# Altium PCB 4.PcbDoc
Units mil, origin at the board's own origin, x right, y up, seen from the top; angles counter-clockwise.
Board outline 1279.91 x 1283.3 mil, 4 copper layers (Top Layer, GND02, PWR03, Bottom Layer), stack 23.756 mil thick; 31 components, 52 nets, 163 pads, 53 vias.
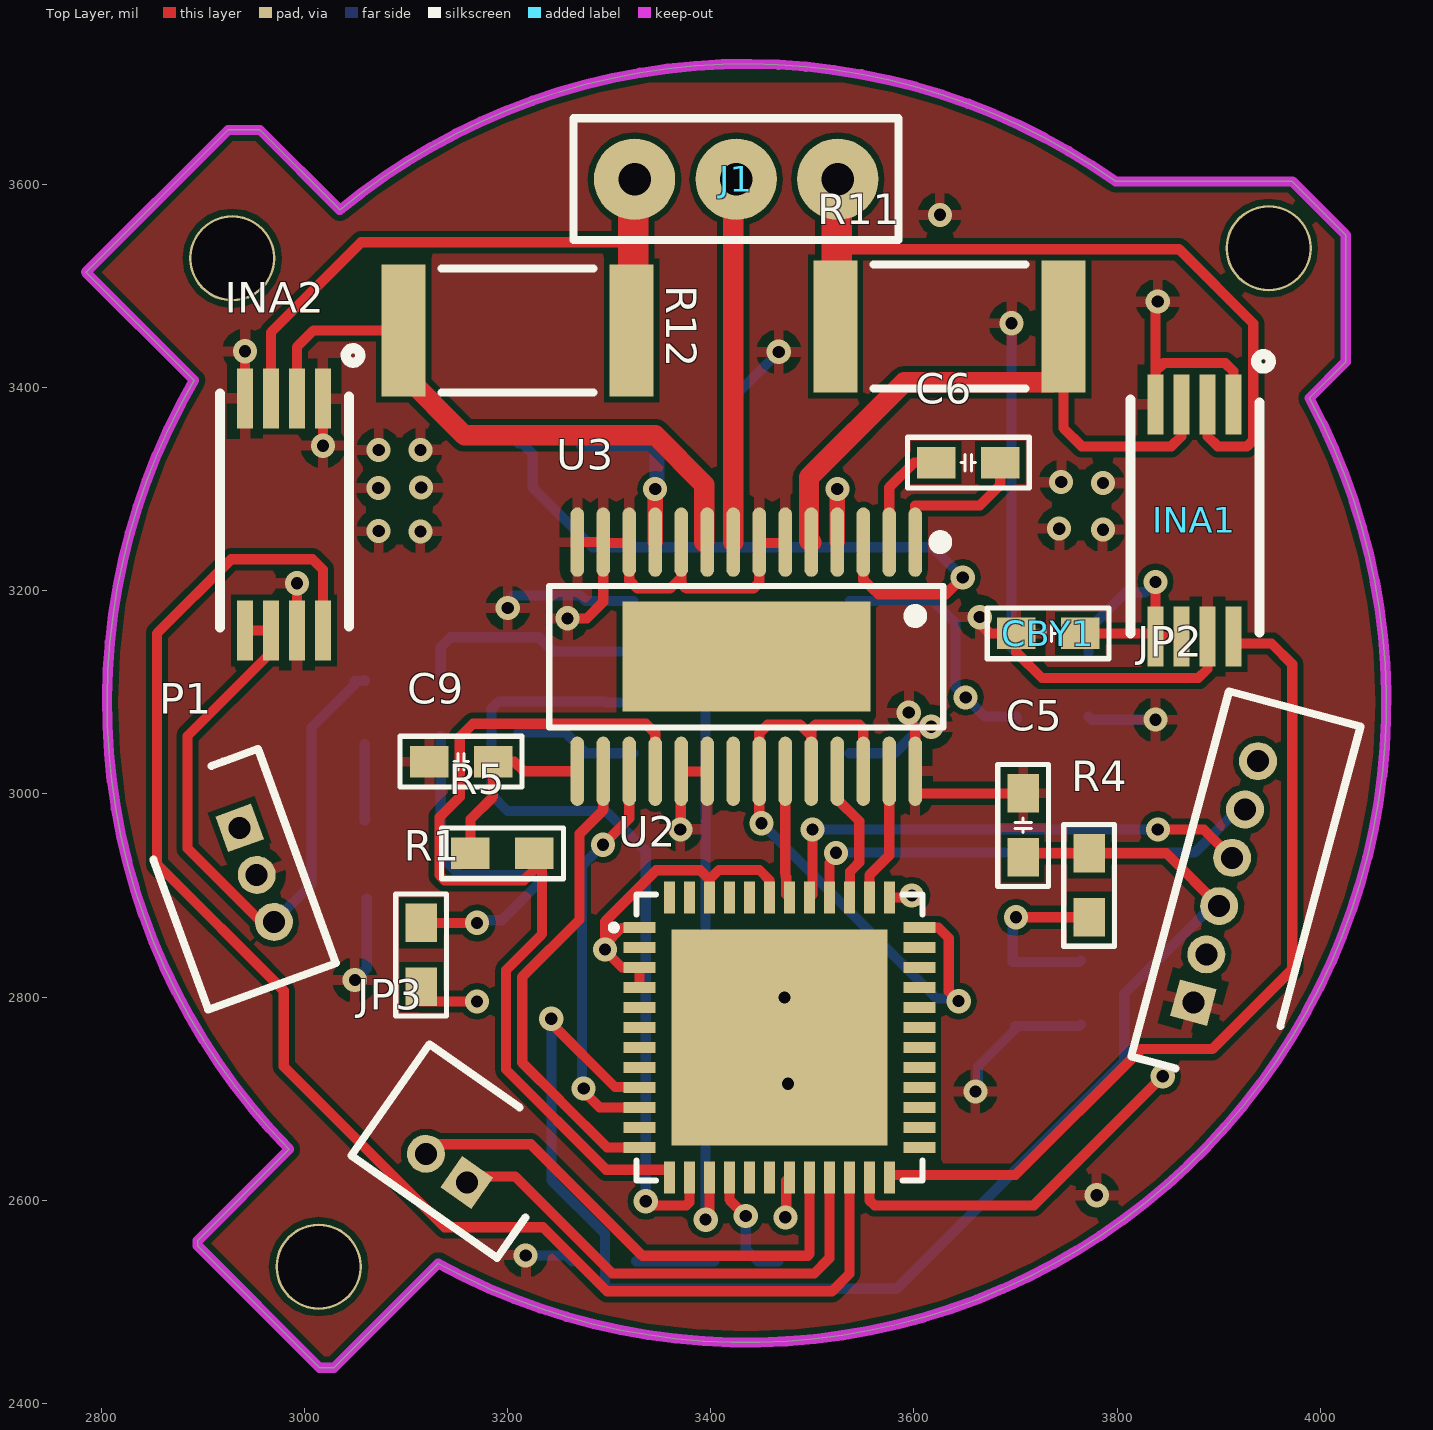
[diagram p0: Top Layer view]
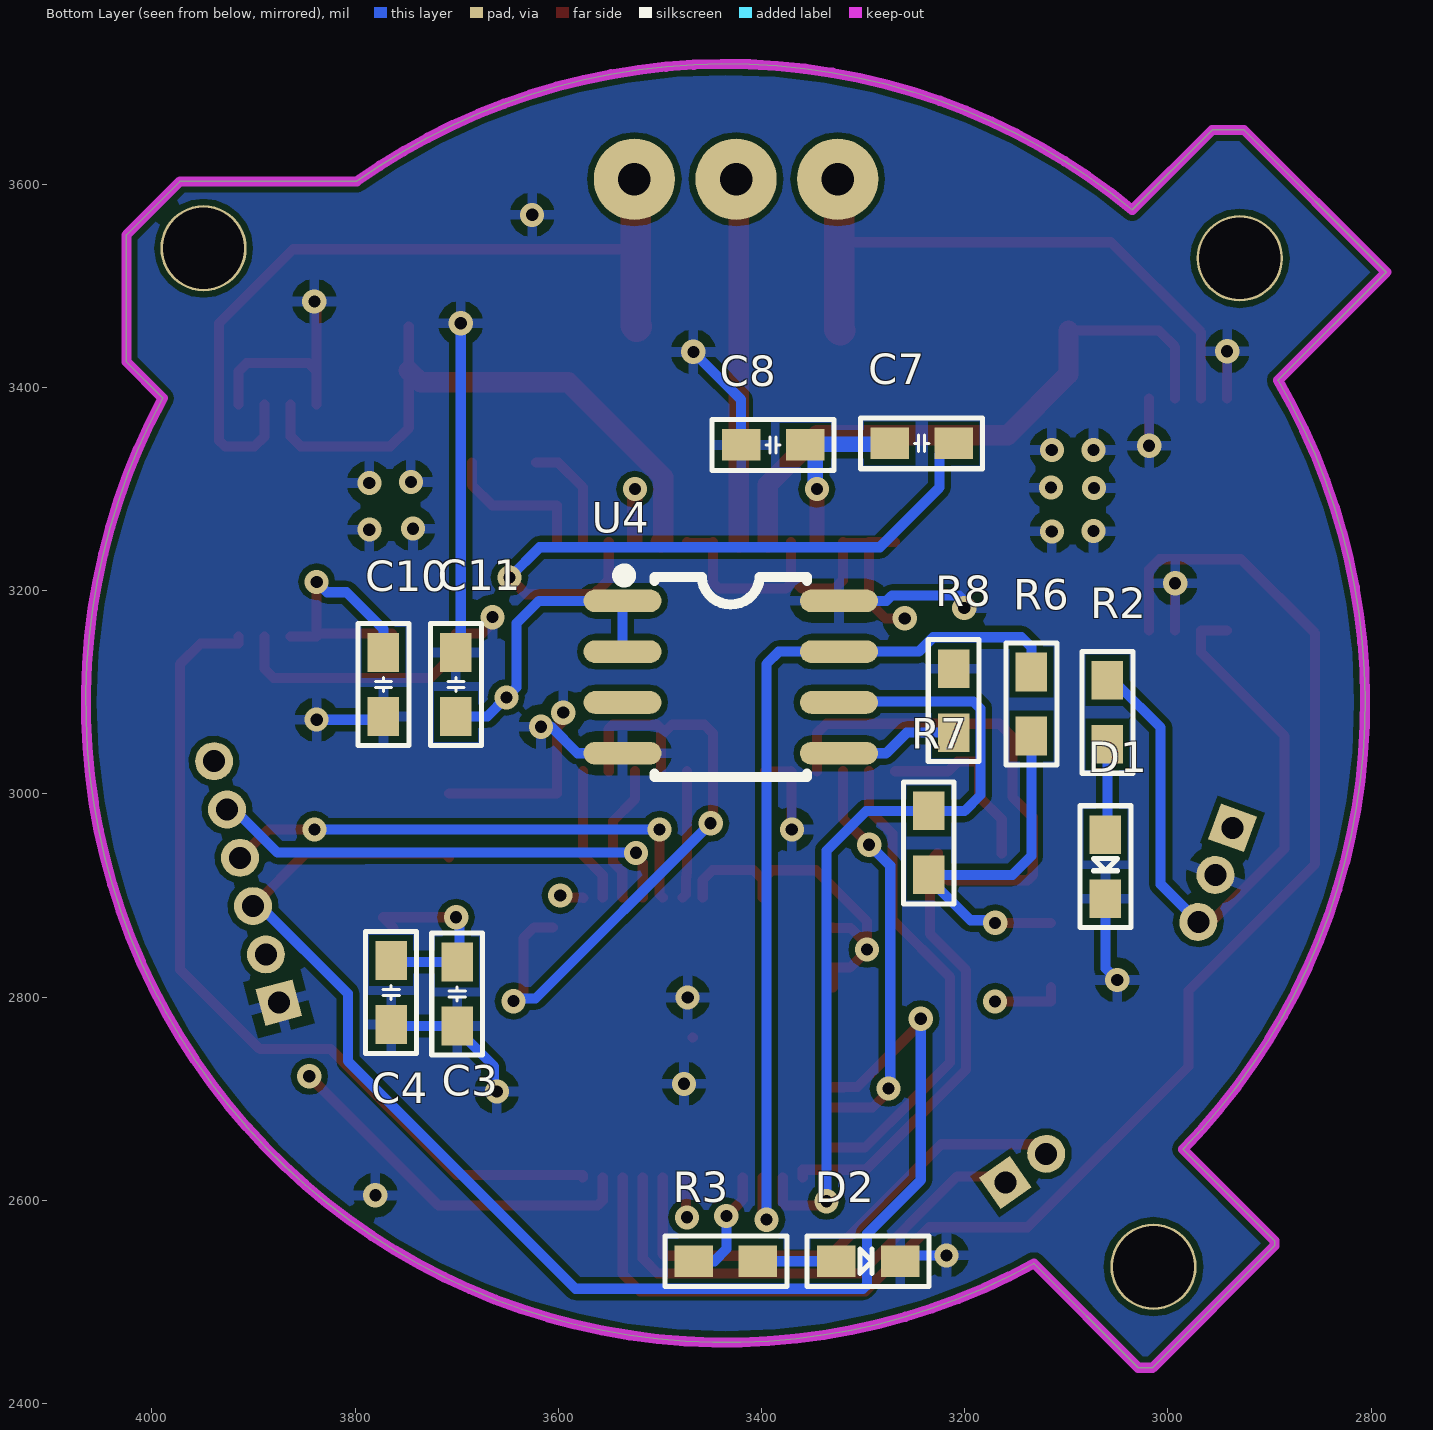
[diagram p1: Bottom Layer view, seen from below]
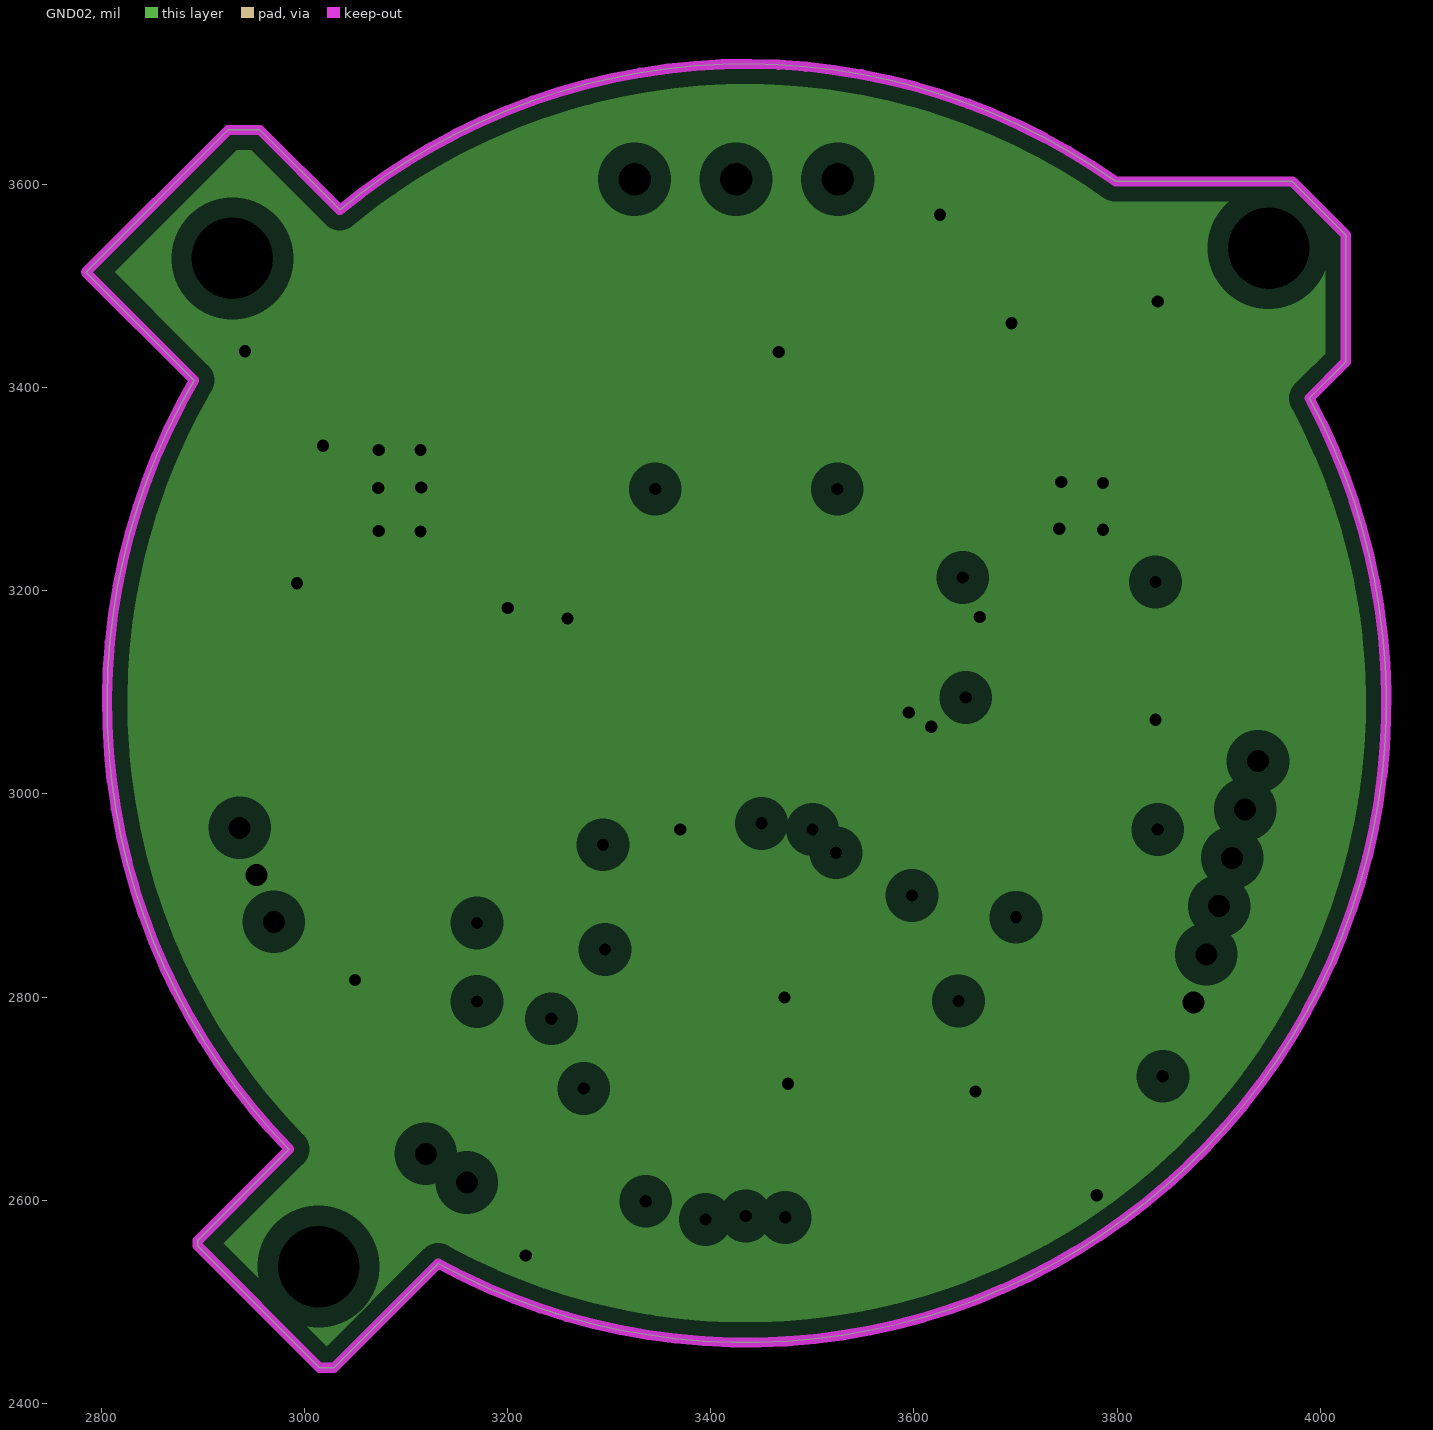
[diagram p2: GND02, clearances drawn from the general rule]
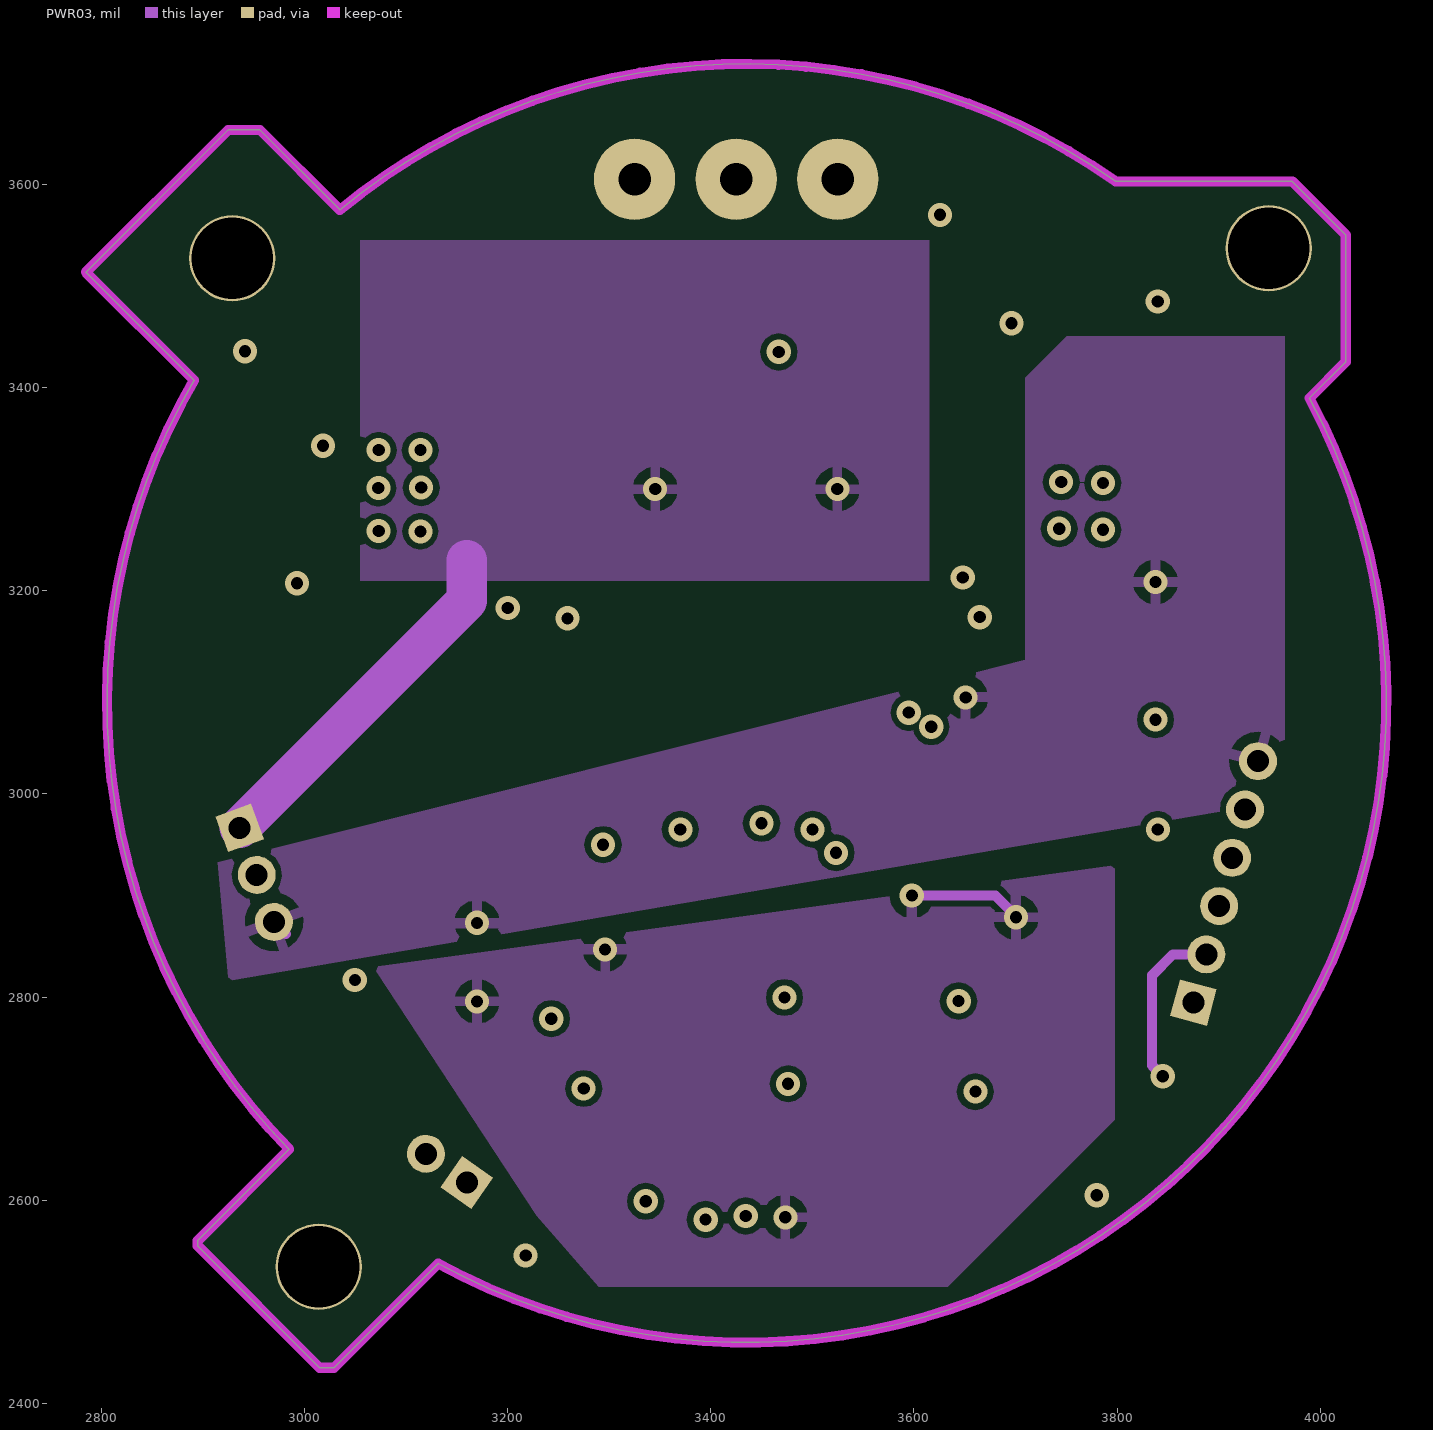
[diagram p3: PWR03]

## Layer stack, top to bottom
Top Solder: solder mask 0.4, Solder Resist, Dk 3.5
Top Layer: signal copper 1.4
Dielectric 3: prepreg 2.8, PP-006, Dk 4.1
GND02: plane copper 1.3778, net GND
Dielectric 2: prepreg 2.8, PP-006, Dk 4.1
PWR03: signal copper 1.3778
Dielectric 1: dielectric 12.6, FR-4, Dk 4.8
Bottom Layer: signal copper 1.4
Bottom Solder: solder mask 0.4, Solder Resist, Dk 3.5

## Board outline
2895,2555.21 2895,2560.21 2985,2650.21 cw(c3435,3090) 2891.58,3407.2 2891.44,3407.06 2785,3513.5 2925,3653.5 2956.36,3653.5 3035.02,3574.84 3034.92,3574.74 cw(c3435,3090) 3798.34,3602.86 3972.35,3602.86 4025,3550.21 4025,3425.21 3989.33,3389.54 3989.26,3389.5 cw(c3435,3090) 3131.76,2537.78 3029.19,2435.21 3015,2435.21

## Design rules (kind name [scope] priority, off if disabled: settings)
Clearance [All] p1: gap=6 ignorepadtopadclearanceinfootprint=FALSE
MinimumSolderMaskSliver [All] p1: minsoldermaskwidth=0
PlaneClearance [All] p1: clearance=20
PlaneConnect [All] p1: planeconnectstyle=Relief reliefexpansion=20 reliefentries=4 reliefconductorwidth=10 reliefairgap=10
PolygonConnect [All] p1: connectstyle=Relief reliefconductorwidth=10 reliefentries=4 polygonreliefangle="90 Angle" airgapwidth=10
RoutingVias [All] p1: holewidth=12 width=24 viastyle="Through Hole" minholewidth=28 minwidth=50 maxholewidth=28 maxwidth=50
SilkToSilkClearance [All] p1: silktosilkclearance=0
SilkToSolderMaskClearance [IsPad] p1: minsilkscreentomaskgap=0 clearancetoexposedcopper=TRUE
SolderMaskExpansion [All] p1: expansion=4
Width [All] p1: maxlimit=50 minlimit=1 preferedwidth=10
25 further rules are at their usual default settings.

## Components (designator, comment, footprint, x,y, rotation, side; value= is the part's Value field where it differs from the comment)
C3 "10uF" 0603C 3699.49,2803.02 r90 bottom
C4 "100nF" 0603C 3764.5,2804.47 r90 bottom
C5 "1uF" 0603C 3707.49,2969 r270 top
C6 "10nF" 0603C 3653.5,3326.01 r0 top
C7 "100nF" 0603C 3242.34,3345 r0 bottom
C8 "10uF" 0603C 3388.5,3343.4 r180 bottom
C9 "1uF" 0603C 3154.33,3031.76 r0 top
C10 "100nF" 0603C 3772,3107.63 r90 bottom
C11 "10uF (106) 10% 10V" 0603C 3700.7,3107.63 r270 bottom
CBY1 "0.1μF" 0603C 3732.2,3158 r180 top
D1 "蓝灯 0603" 0603_diode 3061.38,2928.32 r270 bottom
D2 "蓝灯 0603" 0603_diode 3295,2540 r180 bottom
INA1 "INA240A2" INA240 3876.15,3269.22 r180 top
INA2 "INA240A1" INA240 2980,3275 r180 top
J1 "90120-0763" 10.7MHZ 3525,3605 r180 top
JP2 "SPI1" SHDR6 3875,2794.48 r75 top
JP3 "Header 2" SHDR2 3160,2617.5 r325 top
P1 "TB002-500-03BE" SHDR3 2936.34,2966.49 r110 top
R1 "0Ω (0R0) ±1%" 0603R 3115,2841.49 r90 top
R2 "2KΩ" 0603R 3059.43,3080.27 r90 bottom
R3 "2KΩ" 0603R 3435,2540 r0 bottom
R4 "10K" 0603R 3772.5,2910 r270 top
R5 "10K" 0603R 3195,2941.5 r0 top
R6 "10KΩ" 0603 3134.21,3088.5 r270 bottom
R7 "10K" 0603R 3235.34,2951.73 r270 bottom
R8 "1K" 0603 3210.83,3091.76 r90 bottom
R11 "10mOhm" RESC6332#1 3635,3460 r180 top
R12 "10mOhm" RESC6332#2 3210,3456.12 r0 top value=1K
U2 "ESP32-PICO-D4" pico 3478.53,2760.21 r270 top
U3 "DRV8313PWPR" HTSSOP-28_L9.8-W4.5-P0.65-LS6.6-BL-EP 3435,3135 r180 top
U4 "AS5600-ASOM" SOIC-8_L5.0-W4.0-P1.27-LS6.0-BL 3430.21,3115 r270 bottom

## Footprints (in the part's own frame and the unit in brackets; to place one, negate y for a bottom-side part, rotate by r counter-clockwise, add the part's x,y. Pads: shape width x height; smd on the part's side, far side on the other; paste and mask are expansions set on the pad)
10.7MHZ [mil]
  round 80 hole 32: 1(0,0) 2(200,0) 3(100,0)
  silkscreen extent -60,-60 260,60
0603 [mil]
  rect 38x31 smd: 1(-31.5,0) 2(31.5,0)
  silkscreen extent -60,-25 60,25
0603_diode [mil]
  rect 38x31 smd: 1(-31.5,0) 2(31.5,0)
  silkscreen extent -60,-25 60,25
0603C [mil]
  rect 38x31 smd: 1(-31.5,0) 2(31.5,0)
  silkscreen extent -60,-25 60,25
0603R [mil]
  rect 38x31 smd: 1(-31.5,0) 2(31.5,0)
  silkscreen extent -60,-25 60,25
HTSSOP-28_L9.8-W4.5-P0.65-LS6.6-BL-EP [mil]
  oval 13.5x68.2 smd mask+2: 1(-166.3,-112.8) 2(-140.7,-112.8) 3(-115.2,-112.8) 4(-89.6,-112.8) 5(-64,-112.8) 6(-38.4,-112.8) 7(-12.8,-112.8) 8(12.8,-112.8) 9(38.4,-112.8) 10(64,-112.8) 11(89.6,-112.8) 12(115.2,-112.8) 13(140.8,-112.8) 14(166.3,-112.8) 15(166.3,112.8) 16(140.8,112.8) 17(115.2,112.8) 18(89.6,112.8) 19(64,112.8) 20(38.4,112.8) 21(12.8,112.8) 22(-12.8,112.8) 23(-38.4,112.8) 24(-64,112.8) 25(-89.6,112.8) 26(-115.2,112.8) 27(-140.7,112.8) 28(-166.3,112.8)
  rect 244.1x108.3 smd mask+2: 29(0,0)
  silkscreen extent -197,-119 194,70
INA240 [mm]
  rect 0.4x1.5 smd mask+0.05: 1(-0.975,-2.9) 2(-0.325,-2.9) 3(0.325,-2.9) 4(0.975,-2.9) 5(0.975,2.9) 6(0.325,2.9) 7(-0.325,2.9) 8(-0.975,2.9)
  silkscreen extent -1.91,-4.16 1.6,2.82, body extent -1.5,-3.3 1.5,3.3, height 1.2
pico [mm]
  rect 0.28x0.8 smd: 1(-2.75,-3.778) 2(-2.25,-3.778) 3(-1.75,-3.778) 4(-1.25,-3.778) 5(-0.75,-3.778) 6(-0.25,-3.778) 7(0.25,-3.778) 8(0.75,-3.778) 9(1.25,-3.778) 10(1.75,-3.778) 11(2.25,-3.778) 12(2.75,-3.778) 25(2.75,3.222) 26(2.25,3.222) 27(1.75,3.222) 28(1.25,3.222) 29(0.75,3.222) 30(0.25,3.222) 31(-0.25,3.222) 32(-0.75,3.222) 33(-1.25,3.222) 34(-1.75,3.222) 35(-2.25,3.222) 36(-2.75,3.222)
  rect 0.8x0.28 smd: 13(3.5,-3.027) 14(3.5,-2.527) 15(3.5,-2.027) 16(3.5,-1.527) 17(3.5,-1.027) 18(3.5,-0.527) 19(3.5,-0.027) 20(3.5,0.473) 21(3.5,0.973) 22(3.5,1.473) 23(3.5,1.973) 24(3.5,2.473) 37(-3.5,2.473) 38(-3.5,1.972) 39(-3.5,1.473) 40(-3.5,0.972) 41(-3.5,0.473) 42(-3.5,-0.028) 43(-3.5,-0.527) 44(-3.5,-1.028) 45(-3.5,-1.527) 46(-3.5,-2.028) 47(-3.5,-2.527) 48(-3.5,-3.028)
  rect 5.4x5.4 smd: 49(0,-0.278)
  silkscreen extent -3.58,-4.49 3.58,3.3
RESC6332#1 [mil] "Chip Resistor, Body 6.3x3.2mm, IPC High Density"
  rect 43.3x129.9 smd: 1(-112.2,0)
  rect 43x130 smd: 2(112.2,0)
  silkscreen extent -75,-61 75,61, body extent -127,-66 127,66, height 35
RESC6332#2 [mil] "Chip Resistor, Body 6.3x3.2mm, IPC High Density"
  rect 43.31x129.92 smd: 1(-112.2,0) 2(112.2,0)
  silkscreen extent -75,-61 75,61, body extent -127,-66 127,66, height 35
SHDR2 [mm]
  rect 0.95x0.95 hole 0.55: 1(0,0)
  round 0.95 hole 0.55: 2(-1.25,0)
  silkscreen extent -2.75,-1.11 1.7,2.29
SHDR3 [mm]
  rect 0.95x0.95 hole 0.55: 1(0,0)
  round 0.95 hole 0.55: 2(-1.25,0) 3(-2.5,0)
  silkscreen extent -4,-1.11 1.7,2.29
SHDR6 [mm]
  rect 0.95x0.95 hole 0.55: 1(0,0)
  round 0.95 hole 0.55: 2(1.25,0) 3(2.5,0) 4(3.75,0) 5(5,0) 6(6.25,0)
  silkscreen extent -1.7,-2.25 7.75,1.15
SOIC-8_L5.0-W4.0-P1.27-LS6.0-BL [mil]
  oval 22.38x76.78 smd mask+2: 1(-75,-106.5) 2(-25,-106.5) 3(25,-106.5) 4(75,-106.5) 5(75,106.5) 6(25,106.5) 7(-25,106.5) 8(-75,106.5)
  silkscreen extent -106,-111 98,75

## Part data
C3 C8 C11: SuppliersPartNumber=C19702, ComponentLink1Description=供?, ComponentLink1URL=http://www.szlcsc.com/product/details_20411.html, Supplier=LC
C4 C7 C10: SuppliersPartNumber=C14663, ComponentLink1Description=供?, ComponentLink1URL=http://www.szlcsc.com/product/details_15331.html, Supplier=LC
C5 C9: SuppliersPartNumber=C15849, ComponentLink1Description=供?, ComponentLink1URL=http://www.szlcsc.com/product/details_16531.html, Supplier=LC
C6: SuppliersPartNumber=C57112, ComponentLink1Description=供?, ComponentLink1URL=http://www.szlcsc.com/product/details_58143.html, Supplier=LC
CBY1: library part CAP_1
D1 D2: SuppliersPartNumber=C72041, ComponentLink1Description=供?, ComponentLink1URL=http://www.szlcsc.com/product/details_73150.html, Supplier=LC
INA1 INA2: library part INA240, Supplier Part Number 1=595-INA240A2PWR, Supplier 1=Mouser
J1: Current Rating=3A, Manufacturer=Molex, Temperature="-55°C to +125?", Temperature Range High=+125°C, Temperature Range Low=-55°C, Voltage Rating=350V, Automotive=No, Category=Conn, ComponentLink2Description=Datasheet, ComponentLink2URL=https://www.molex.com/webdocs/datasheets/pdf/en-us/0901200763_PCB_HEADERS.pdf, Conn Gender=Male, Conn Orientation=Vertical, Contact Material=Gold,Nickel, Device Class L1=Connectors, Device Class L2="Headers and Wire Housings", Device Class L3=unset, Digikey Description="CONN HEADER VERT 3POS 2.54MM", Footprint Url=https://www.molex.com/pdm_docs/sd/901200763_sd.pdf, Height=5.8mm, Lead Free=Yes, Manufacturer Part Number=90120-0763, Mouser Description="Board-To-Board Connector, C-Grid III 90120 Series, Through Hole, Header, 3, 2.54 mm", Number Of Contacts=3, Number Of Rows=1, Octopart=https://octopart.com/90120-0763-molex-655433, Pitch=2.54mm, RoHS=TRUE
JP2: library part "HEADER 6"
JP3: "Header, 2-Pin", LatestRevisionDate=17-Jul-2002, LatestRevisionNote="Re-released for DXP Platform.", Publisher="Altium Limited"
P1: Supplier Part Number 1=490-TB002-500-03BE, Supplier 1=Mouser
R1: SuppliersPartNumber=C21189, ComponentLink1Description=供?, ComponentLink1URL=http://www.szlcsc.com/product/details_21903.html, Supplier=LC
R2 R3: SuppliersPartNumber=C22975, ComponentLink1Description=供?, ComponentLink1URL=http://www.szlcsc.com/product/details_23702.html, Supplier=LC
R4 R5 R6 R7: SuppliersPartNumber=C25804, ComponentLink1Description=供?, ComponentLink1URL=http://www.szlcsc.com/product/details_26547.html, Supplier=LC
R8: SuppliersPartNumber=C21190, ComponentLink1Description=供?, ComponentLink1URL=http://www.szlcsc.com/product/details_21904.html, Supplier=LC
R11: library part RES2
R12: library part Res1, "Resistor", Ordered by=Subcon, Published=8-Jun-2000, Publisher="Altium Limited", Revision="July-2002: Re-released for DXP Platform."

## Free pads (board coordinates)
  round 85 hole 80: 8(2929.11,3527.08) 8(3014.11,2534.65) 8(3949.11,3537.08)

## Via types
v1: diameter 23.62/23.62/23.62 (per signal layer), hole 12, Top Layer to Bottom Layer, 27 vias
v2: diameter 24, hole 12, Top Layer to Bottom Layer, 25 vias
v3: diameter 23.62, hole 12, Top Layer to Bottom Layer, 1 vias

## Nets (pads, with @x,y where several pads share a name; then routed paths per layer and width w, separated by ;. In a path a pad name is that pad's centre, name@x,y a point inside that pad or via, vN(x,y) a via of type N, cw(c..) or ccw(c..) an arc to the next point about the centre after c; other vN are vias at no path point)
EN: C5.2 JP2.3 R4.1 U2.9 | length 1429.1
  Top Layer w10: v2(3243.13,2778.74) 3243.13,2774.13 3305.75,2711.51 3329.29,2711.51 U2.9 U2.9@3318.9,2711 ; C5.2 3711.49,2941.5 R4.1 3848.53,2941.5 JP2.3
  Bottom Layer w10: v2(3243.13,2778.74) 3243.13,2619.87 3296,2567 3296,2517 3300,2513 3582.99,2513 3806.95,2736.97 3806.95,2803.24 3893.27,2889.55 JP2.3
ENA: U2.36 U3.22 U3.24 U3.26 | length 652.8
  Top Layer w10: v2(3450,2971) 3447.8,2973.2 U3.22 3447.8,3059.8 3456,3068 3488,3068 3499,3057 ; U3.24 3499,3057 ; U3.26 3550.2,3064 3546.2,3068 3503,3068 3499,3064 3499,3057 ; U2.36 3624,2868.48 3634.34,2858.14 3634.34,2805.66 v2(3644,2796)
  Bottom Layer w10: v2(3450,2971) 3622.32,2798.68 3641.32,2798.68 v2(3644,2796)
FAULT: R5.2 U2.13 U3.18 | length 939.1
  Top Layer w10: U3.18 3345.4,3059.6 3336,3069 3166,3069 3153,3056 3153,2997 3133,2977 3133,2920 3138,2915 3216,2915 3226.5,2925.5 R5.2 3233.98,2934.02 3233.98,2861.97 3198.56,2826.54 3198.56,2728.65 3297.21,2630 3359.34,2630 U2.13
FLASH_CLK: U2.31
FLASH_CS: U2.25
FLASH_SD0: U2.27
FLASH_SD1: U2.33
FLASH_SD2: U2.30
FLASH_SD3: U2.32
GND: C3.1 C4.1 C5.1 C8.1 C9.1 C10.1 C11.1 CBY1.2 D1.2 D2.2 INA1.1 INA1.4 INA1.7 INA2.1 INA2.4 INA2.7 JP2.1 P1.2 R8.2 U2.49 U3.6 U3.7 U3.10 U3.12 U3.13 U3.14 U3.19 U3.20 U3.28 U4.4 U4.8 | length 2378.4
  Top Layer w10: INA2.4 v2(2941.61,3435.7) ; INA2.7 v2(2992.8,3207.35) ; v2(3018.39,3342.65) INA2.1 ; v2(3258.99,3172.69) 3277.94,3172.69 3294.2,3188.95 U3.13@3294.2,3247 ; U3.14 3268.7,3248 3294.2,3248 U3.13 U3.13@3294.2,3247 ; U3.12 U3.12@3319.8,3247 ; v1(3370.07,2965) 3370.53,2965.47 3370.53,3021.73 U3.19 3371,3022 3396.6,3022 U3.20 ; U3.10 3371,3213 ; U3.7 U3.7@3447.8,3247 ; U3.6 3473.4,3247 U3.7@3447.8,3247 ; v2(3595,3080) 3595,3076 3593,3074 3601.3,3065.7 U3.28 3601.3,3000.5 C5.1 ; v2(3664.7,3174) 3664.7,3168 3674.71,3158 CBY1.2 3700.7,3139.3 3726,3114 3880,3114 3888.94,3122.94 INA1.7 ; INA1.4 3837.76,3416 ; v2(3840,3484.58) 3837.76,3482.34 3837.76,3416 ; INA1.1 3914.53,3416 3906.53,3424 3845.76,3424 3837.76,3416 ; U3.13@3294.2,3247 U3.12@3319.8,3247 ; U3.12@3319.8,3247 3319.8,3210.2 3328,3202 3360,3202 3371,3213 ; 3371,3213 3371,3207 3376,3202 3441.8,3202 3447.8,3208 U3.7@3447.8,3247
  Bottom Layer w10: v2(3049.76,2816.8) 3061.38,2828.42 D1.2 ; v2(3200.3,3183) 3200.3,3190 3205.52,3195.22 3271.61,3195.22 3276.83,3190 U4.8 ; v1(3217.89,2545.75) 3257.75,2545.75 D2.2 ; C8.1 3420,3388 v2(3467,3435) ; U4.4 3581,3040 3607,3066 v2(3617,3066) ; v1(3660.5,2707) 3663.11,2709.61 3663.11,2731.64 3699.49,2768.02 C3.1 3763.05,2771.52 C4.1 ; v2(3696,3463.14) 3696,3143.83 C11.1 ; C10.1 3775.1,3073.02 v1(3837.76,3073.02) ; v2@3778.62,2605 v2(3780,2605)
  other v1: 3476.19,2714.68 3472.61,2799.58 3114.24,3258.4 3073.19,3258.6 3786,3260 3743,3261 3072.81,3301.01 3115,3301.43 3786,3306 3745,3306.95 3073.19,3338.4 3114.24,3338.4 3625.58,3570
GPIO0: JP2.2 U2.23 | length 531.5
  Top Layer w10: U2.23 3556.19,2600 3561.19,2595 3718,2595 v2(3845,2722)
  PWR03 w10: v2(3845,2722) 3834.46,2732.54 3834.46,2821.46 3855.02,2842.02 JP2.2
GPIO2: INA2.8 U2.22 | length 1486
  Top Layer w10: INA2.8 3018.39,3220.61 3008,3231 2928,3231 2855,3158 2855,2931 2979.74,2806.26 2979.74,2731.76 3138.06,2573.44 3234.94,2573.44 3297.88,2510.49 3519.49,2510.49 3536.51,2527.51 U2.22
GPIO4: INA1.8 U2.24 | length 856.4
  Top Layer w10: U2.24 3575.88,2625 3700,2625 3823.78,2748.78 3893.68,2748.78 3972.37,2827.47 3972.37,3127.63 3952,3148 3914.53,3148 INA1.8
GPIO5: U2.34
GPIO9: U2.28
GPIO10: U2.29
GPIO12: U2.18
GPIO13: JP3.2 U2.20 | length 508.4
  Top Layer w10: JP3.2 3130,2645.73 3130,2655.14 3222.94,2655.14 3332.69,2545.38 3495.52,2545.38 3497.14,2547 U2.20
GPIO14: U2.17
GPIO15: JP3.1 U2.21 | length 484.6
  Top Layer w10: JP3.1 3166.07,2623.57 3207.43,2623.57 3303,2528 3502,2528 3516.82,2542.82 U2.21
GPIO18: U2.35
GPIO19: U2.38 U3.27 | length 132.3
  Top Layer w10: U2.38 3556.19,2920 3575.7,2939.51 U3.27
GPIO21: U2.42 U3.23 | length 125.9
  Top Layer w10: U3.23 3473.4,2922.23 3473.77,2921.86 3473.77,2918.82 3474.28,2918.31 3474.28,2901.17 U2.42
GPIO22: U2.39 U3.25 | length 137.1
  Top Layer w10: U3.25 3524.6,2994.85 3546.13,2973.32 3546.13,2932.57 3540.19,2926.63 3537.02,2923.46 3537.02,2898.52 U2.39
GPIO25: R7.1 U2.14 U4.6 | length 817.4
  Top Layer w10: v2(3336,2599) 3340,2595 3376,2595 3379.03,2598.03 U2.14
  Bottom Layer w10: U4.6 3297,3090 3296,3091 3191.52,3091 3184.33,3083.82 3184.33,2998.89 3200,2983.23 R7.1 3296.77,2983.23 3336,2944 v2(3336,2599)
GPIO26: R6.1 U2.15 U4.7 | length 890
  Top Layer w10: v2(3395,2581) 3398.71,2584.71 U2.15
  Bottom Layer w10: R6.1 3134.21,3144.35 3144,3154.14 3230.86,3154.14 3245,3140 U4.7 3383,3140 3395,3128 v2(3395,2581)
GPIO27: R3.2 U2.16 | length 114.1
  Top Layer w10: U2.16 3418.4,2600.6 v2(3434.5,2584.5)
  Bottom Layer w10: v2(3434.5,2584.5) 3434.5,2552 3446.5,2540 R3.2
GPIO32: U2.12 U3.16 | length 469.6
  Top Layer w10: U3.16 3294.2,2984 3271,2960.8 3271,2876.36 3214.56,2819.91 3214.56,2735.47 3252.19,2697.84 3252.19,2697.75 3298,2651.94 U2.12
GPIO34: U2.10 U3.17 | length 396.5
  Top Layer w10: v1(3275,2710) 3275,2707 3290.69,2691.31 U2.10 ; v2(3294,2950) 3319.8,2975.8 U3.17
  Bottom Layer w10: v1(3275,2710) 3273.25,2711.75 3273.25,2929.25 v2(3294,2950)
GPIO35: U2.11
GPIO37: U2.7
GPIO38: U2.6
NetC6_1: C6.1 U3.2 | length 110.3
  Top Layer w10: U3.2 3575.7,3301.71 3600,3326.01 C6.1
NetC6_2: C6.2 U3.1 | length 150.2
  Top Layer w10: U3.1 3601.3,3284 3665,3284 3685,3304 C6.2
NetC7_1: C7.1 U3.3 | length 658.8
  Top Layer w10: U3.3 3550.2,3210.8 3560.85,3200.15 3561.61,3200.15 3565.33,3196.43 3631.43,3196.43 v2(3648,3213)
  Bottom Layer w10: C7.1 3214.34,3345 3224.84,3334.5 3224.84,3301.43 3283.59,3242.68 3618.32,3242.68 v2(3648,3213)
NetC9_2: C9.2 R5.1 U3.15 | length 186.3
  Top Layer w10: R5.1 3163.5,2975 3185.83,2997.33 C9.2 3206.7,3031.76 3216.26,3022.2 U3.15
NetD1_A: D1.1 R2.1 | length 75
  Bottom Layer w10: D1.1@3059.43,2973.79 R2.1
NetD2_A: D2.1 R3.1 | length 77
  Bottom Layer w10: D2.1 R3.1
NetR8_1: R8.1 U4.5 | length 121.3
  Bottom Layer w10: R8.1 3257,3060.26 3277.26,3040 U4.5
NetU2_2: U2.2
RXD: JP2.5 U2.40 | length 467.1
  Top Layer w10: U2.40 3516.82,2931.83 3523.32,2938.33 v1(3523.32,2942.01)
  Bottom Layer w10: v1(3523.32,2942.01) 3523.67,2942.37 3790.19,2942.37 3790.37,2942.19 3876.31,2942.19 3918.75,2984.63 JP2.5
SENSOR_VN: U2.8
SENSOR_VP: U2.5
TXD: JP2.4 U2.41 | length 495.8
  Top Layer w10: U2.41 3500.3,2901.17 v1(3500.3,2965) v1@3500.3,2968 ; v1(3840,2965) 3885.3,2965 JP2.4
  Bottom Layer w10: v1(3500.3,2965) v1(3840,2965)
U: INA1.2 J1.1 R11.2 | length 856.7
  Top Layer w10: R11.2 3522.8,3528 3523.9,3529.1 3530.8,3536 3861,3536 3934,3463 3934,3348 3928,3342 3898.94,3342 3888.94,3352 INA1.2
  Top Layer w30: R11.2 3523.9,3461.1 3523.9,3529.1 3523.9,3603.9 J1.1
U_CS: INA1.3 R11.1 U3.5 | length 618.1
  Top Layer w10: R11.1 3747.2,3416.7 3747.2,3360 3765.2,3342 3853.35,3342 3863.35,3352 INA1.3
  Top Layer w20: U3.5 3496.74,3249.2 3496.74,3311.52 3590.27,3405.05 3735.55,3405.05 R11.1@3747.2,3416.7
V: J1.3 U3.8 | length 358.4
  Top Layer w20: U3.8 3422.2,3602.2 J1.3
VDD3V3: C10.2 C11.2 CBY1.1 INA1.5 INA1.6 INA2.5 INA2.6 JP2.6 P1.3 R1.2 R2.2 R6.2 R7.2 U4.1 U4.2 | length 1661.2
  Top Layer w10: INA2.5 INA2.6 2967.2,3139.17 2885,3056.97 2885,2946.41 2957.41,2874 P1.3 P1.3@2970,2881.41 ; R1.2 v2(3170,2872.99) ; CBY1.1@3775.52,3165.52 CBY1.1@3775.52,3157.92 ; v1(3837.76,3208.61) INA1.5 ; INA1.6 INA1.5 ; CBY1.1@3765.1,3157.92 CBY1.1@3775.52,3157.92 ; CBY1.1@3765.1,3157.92 3763.78,3157.92 CBY1.1 3765.02,3158 CBY1.1@3765.1,3157.92 ; CBY1.1@3765.1,3157.92 3775.52,3147.5 CBY1.1@3775.52,3157.92 ; CBY1.1@3775.52,3157.92 3834.89,3157.92 INA1.5
  PWR03 w10: P1.3 P1.3@2982,2862
  Bottom Layer w10: P1.3 3007.11,2911.11 3007.11,3065.26 3049.48,3107.63 R2.2@3049.48,3111 ; R2.2@3049.48,3111.13 R2.2@3049.48,3111 ; R2.2 3059.43,3111 R2.2@3049.48,3111 ; R6.2 3134.21,2939 3152.98,2920.23 R7.2 3235.34,2916.73 3194.28,2875.67 3172.68,2875.67 v2(3170,2872.99) ; U4.2 U4.1 3619,3190 3641,3168 3641,3105 v1(3651,3095) 3669.87,3076.13 C11.2 C11.2@3700.7,3072.63 ; C10.2 3772,3162 3808.4,3198.4 3827.55,3198.4 v1(3837.76,3208.61)
VDD33: C3.2 C4.2 R1.1 R4.2 U2.1 U2.3 U2.4 U2.19 U2.37 U2.43 U2.46 | length 790.1
  Top Layer w10: R1.1 3115,2795.74 v1(3170,2795.74) ; v1@3295.51,2846.27 3312.67,2829.11 U2.3 U2.4 ; v1(3296.06,2846.81) v1@3296.06,2851.86 ; U2.1 3329.29,2867.97 3312.17,2867.97 v1@3296.06,2851.86 ; U2.46 3398.71,2915.71 ; U2.43 3457.77,2915.23 3448,2925 3408,2925 3398.71,2915.71 ; v1(3473.4,2583.21) 3474.28,2584.09 3474.28,2619.24 U2.19 ; U2.37@3575.36,2897.49 U2.37 3596.01,2898.01 v2(3598,2900) ; v2(3700.5,2878.5) R4.2 R4.2@3762,2868 ; v1@3296.06,2851.86 3296.06,2874.48 3346.33,2924.76 3389.66,2924.76 3398.71,2915.71
  PWR03 w10: v2(3598,2900) 3680,2900 3701,2879 v2@3701,2878.81
  Bottom Layer w10: C3.2@3697.34,2834.52 v2@3697.34,2868 ; C3.2 3763.05,2834.52 C4.2
VIN: C7.2 C8.2 P1.1 U3.4 U3.11 | length 589.8
  Top Layer w15: U3.11 v3(3345.4,3300) ; U3.4 v1(3524.55,3300)
  PWR03 w40: P1.1 3160,3190.15 3160,3230
  Bottom Layer w15: C7.2 3274.63,3344.2 3354.25,3344.2 3355.05,3343.4 3347.05,3335.4 3347.05,3301.65 v3(3345.4,3300)
W: INA2.3 J1.2 R12.2 | length 687.7
  Top Layer w10: INA2.3 2967.2,3454.2 3056,3543 3312,3543 3322.2,3532.8 R12.2
  Top Layer w30: R12.2 3323.6,3457.52 3323.6,3603.6 J1.2
W_CS: INA2.2 R12.1 U3.9 | length 606.2
  Top Layer w10: INA2.2 2992.8,3440 3008.92,3456.12 R12.1 ; U3.9@3393.75,3247.8 U3.9
  Top Layer w20: R12.1 3097.8,3412.82 3157.61,3353 3345.25,3353 3393.75,3304.5 U3.9@3393.75,3247.8
pads on no net: U2.26 U2.44 U2.45 U2.47 U2.48 U3.21 U3.29 U4.3

## Polygon pours and split planes (outlines as drawn)
VDD3V3 on PWR03 "PWR03-VDD3V3" (solid, pour order 10): 2915,2932.93 2925.68,2815.82 3965,2993.57 3965,3450.39 3750.39,3450.39 3709.8,3409.8 3709.8,3132
VIN on PWR03 "PWR03-VIN" (solid, pour order 0): 3055,3545 3055,3460 3055,3210 3615,3210 3615,3545
VDD33 on PWR03 "PWR03-VDD33" (solid, pour order 12): 3068.17,2829.52 3228.68,2585 3290,2515 3633.16,2515 3797.5,2679.34 3797.5,2929.89
GND on Top Layer "Top Layer-GND" (solid, remove dead copper, pour order 14): 2800,3700 2755.37,3655.37 2816.54,2433.54 4085,2444.21 4085,3700
GND on Bottom Layer "Bottom Layer-GND" (solid, remove dead copper, pour order 20): 2832.38,2443.09 4049.34,2394.34 4105,2450 4105,3780 2780,3780 2742.1,3742.1
GND on GND02 (split plane): 292 vertices, not listed, extent 2813.42,2456.53 4045,3698.52

## Keep-outs
Keep-Out Layer:
  lines w10: 2891.44,3407.06 2785,3513.5 2925,3653.5 2956.36,3653.5 3035.02,3574.84 ; 2891.58,3407.2 ccw(c3435,3090) 2985,2650.21 2895,2560.21 2895,2555.21 3015,2435.21 3029.19,2435.21 3131.76,2537.78 ccw(c3435,3090) 3989.26,3389.5 ; 3034.92,3574.74 cw(c3435,3090) 3798.34,3602.86 3972.35,3602.86 4025,3550.21 4025,3425.21 3989.33,3389.54